# Altium PCB R100.230.080.001-00 MeasOutUI.PcbDoc
Units mm, origin at the board's own origin, x right, y up, seen from the top; angles counter-clockwise.
Board outline 45 x 70 mm, 2 copper layers (Top, Bottom), stack 1.571 mm thick; 95 components, 64 nets, 333 pads, 118 vias.
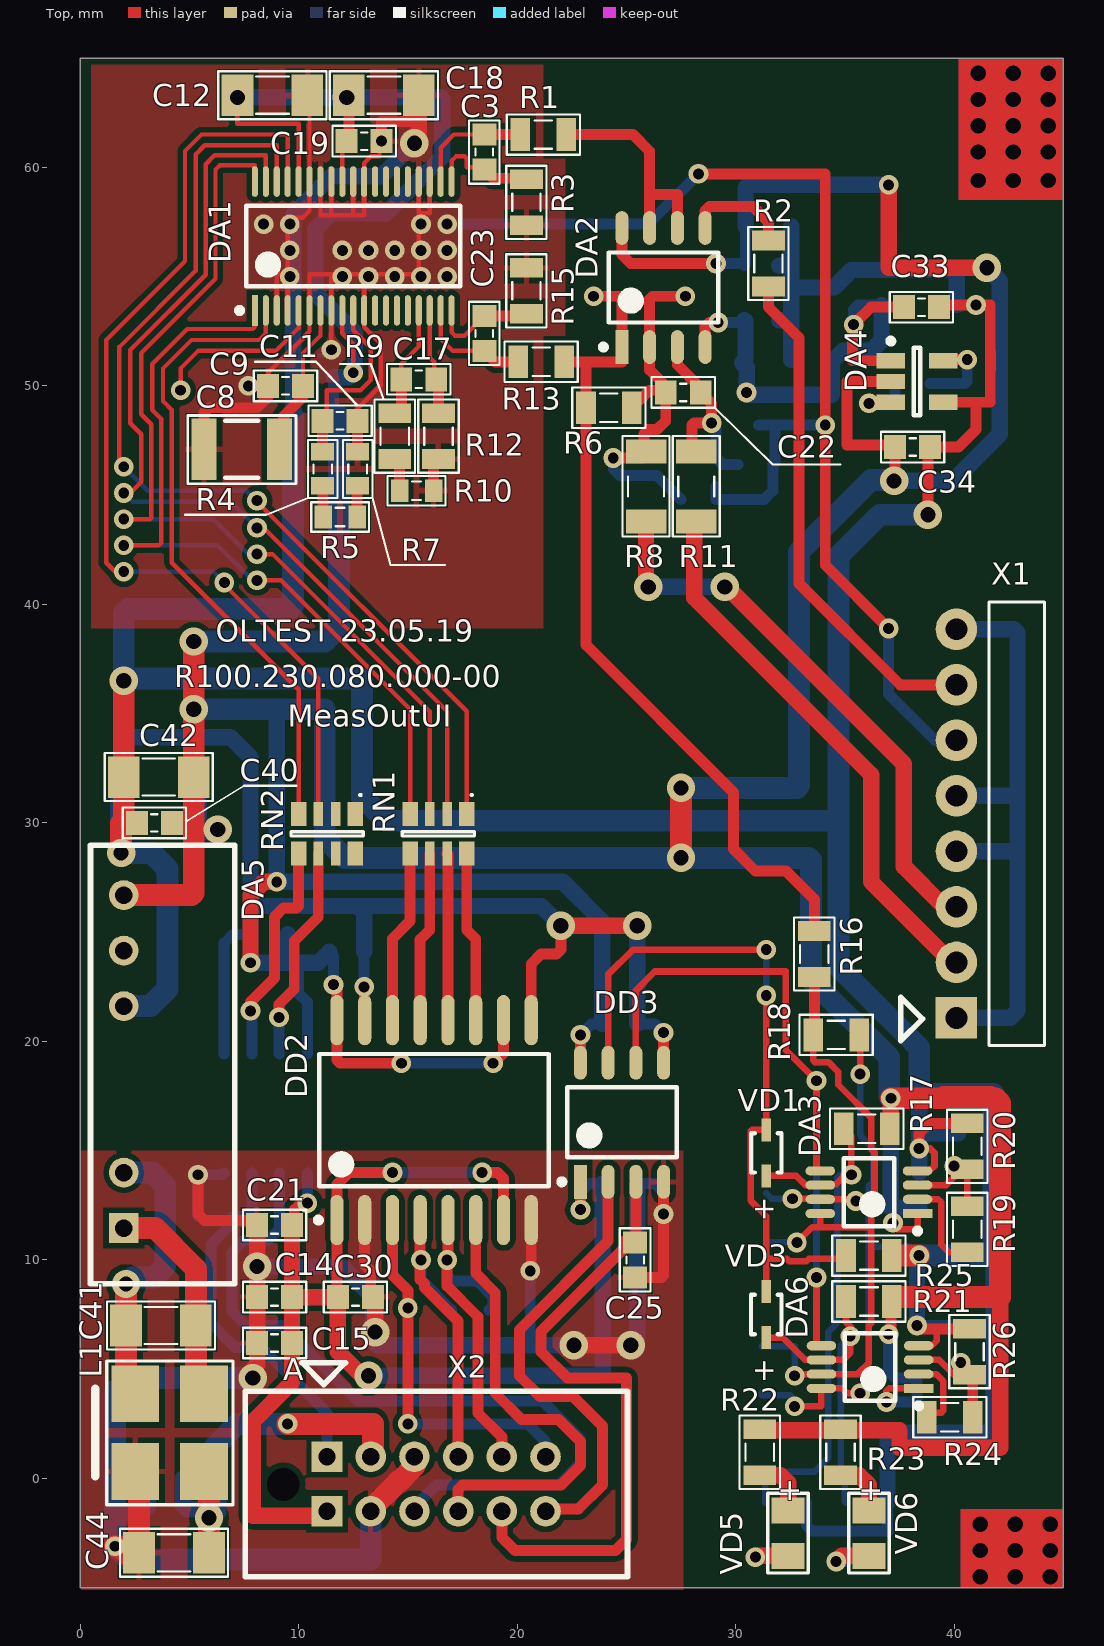
[diagram p0: Top view]
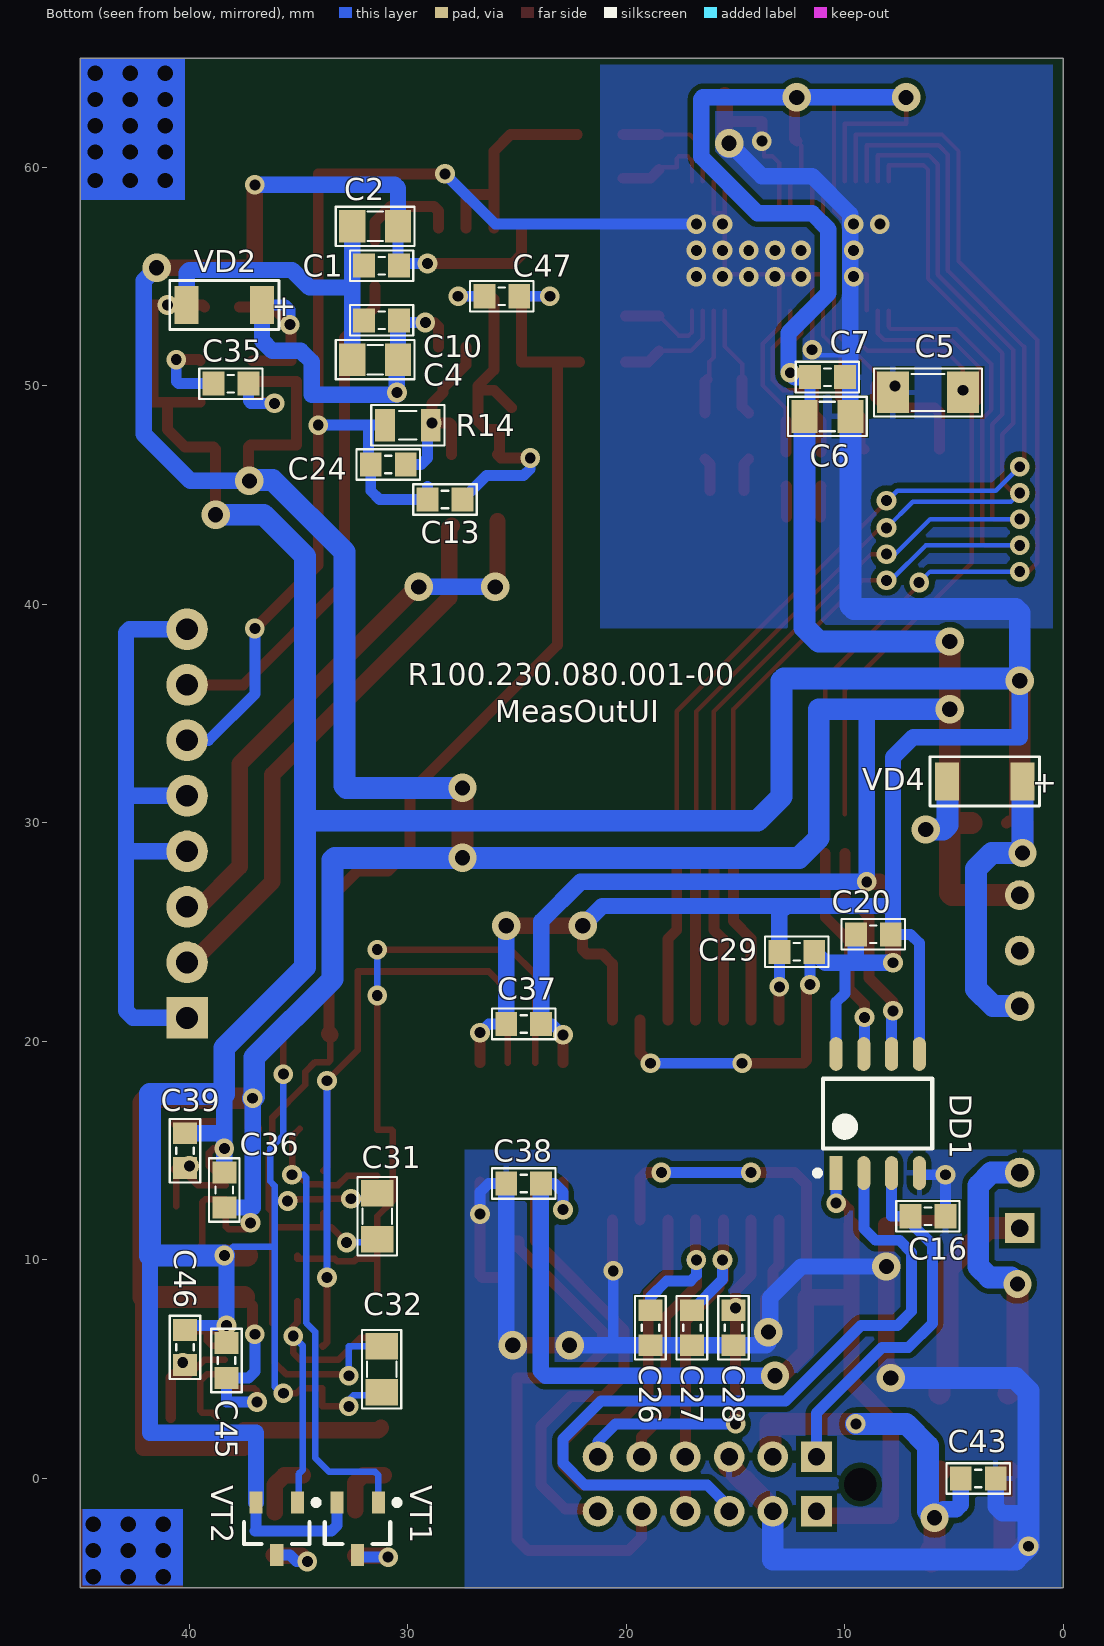
[diagram p1: Bottom view, seen from below]
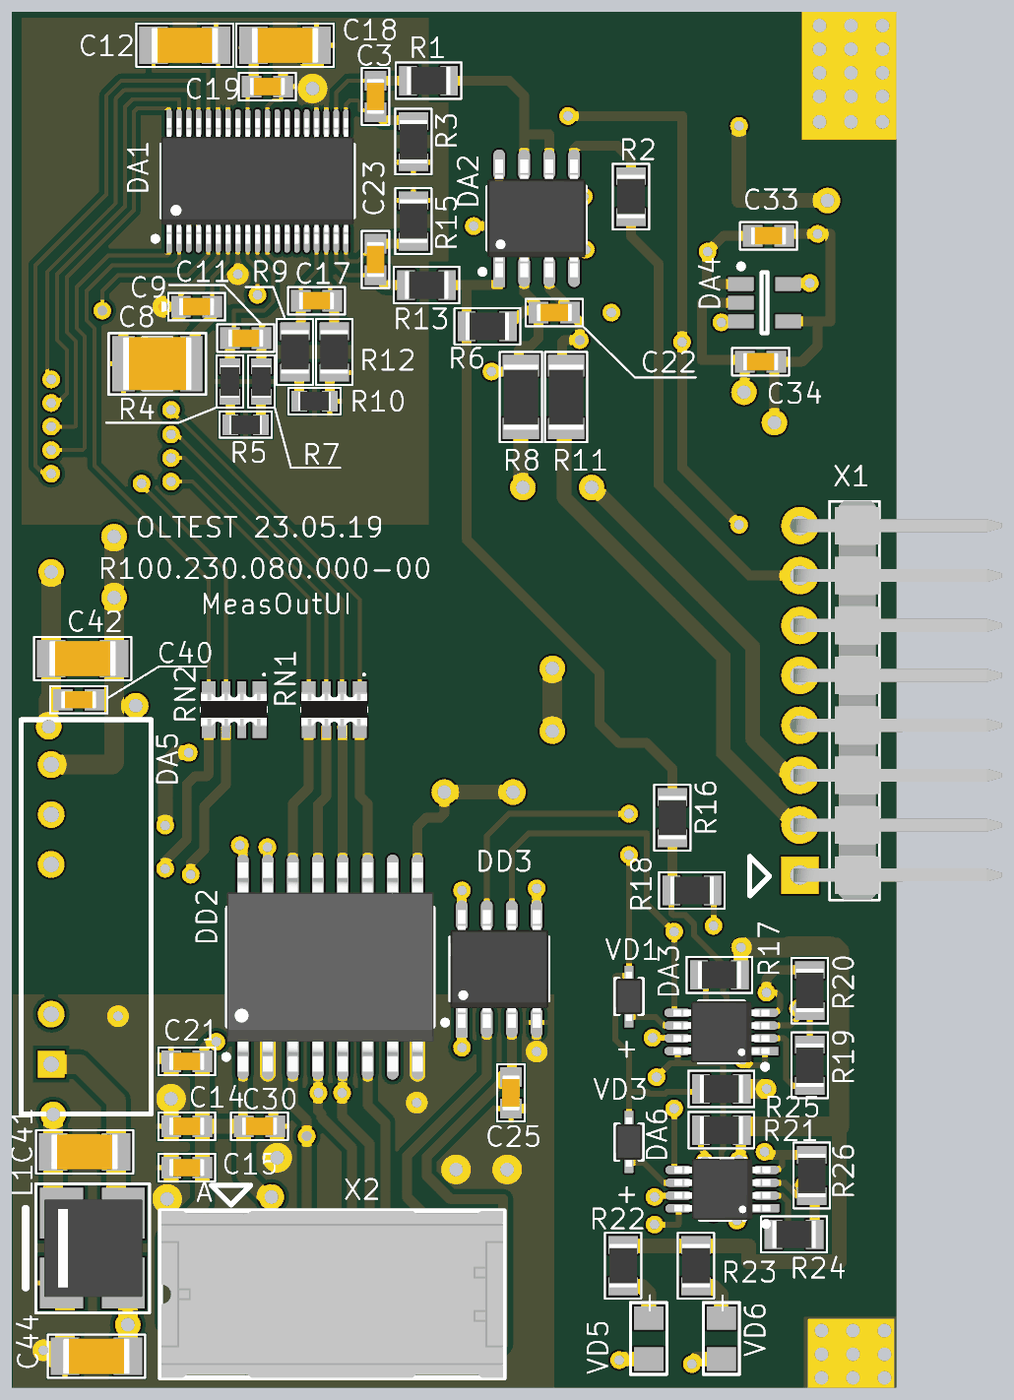
[diagram p2: 3D render of the assembled board from above, using the file's embedded part models]
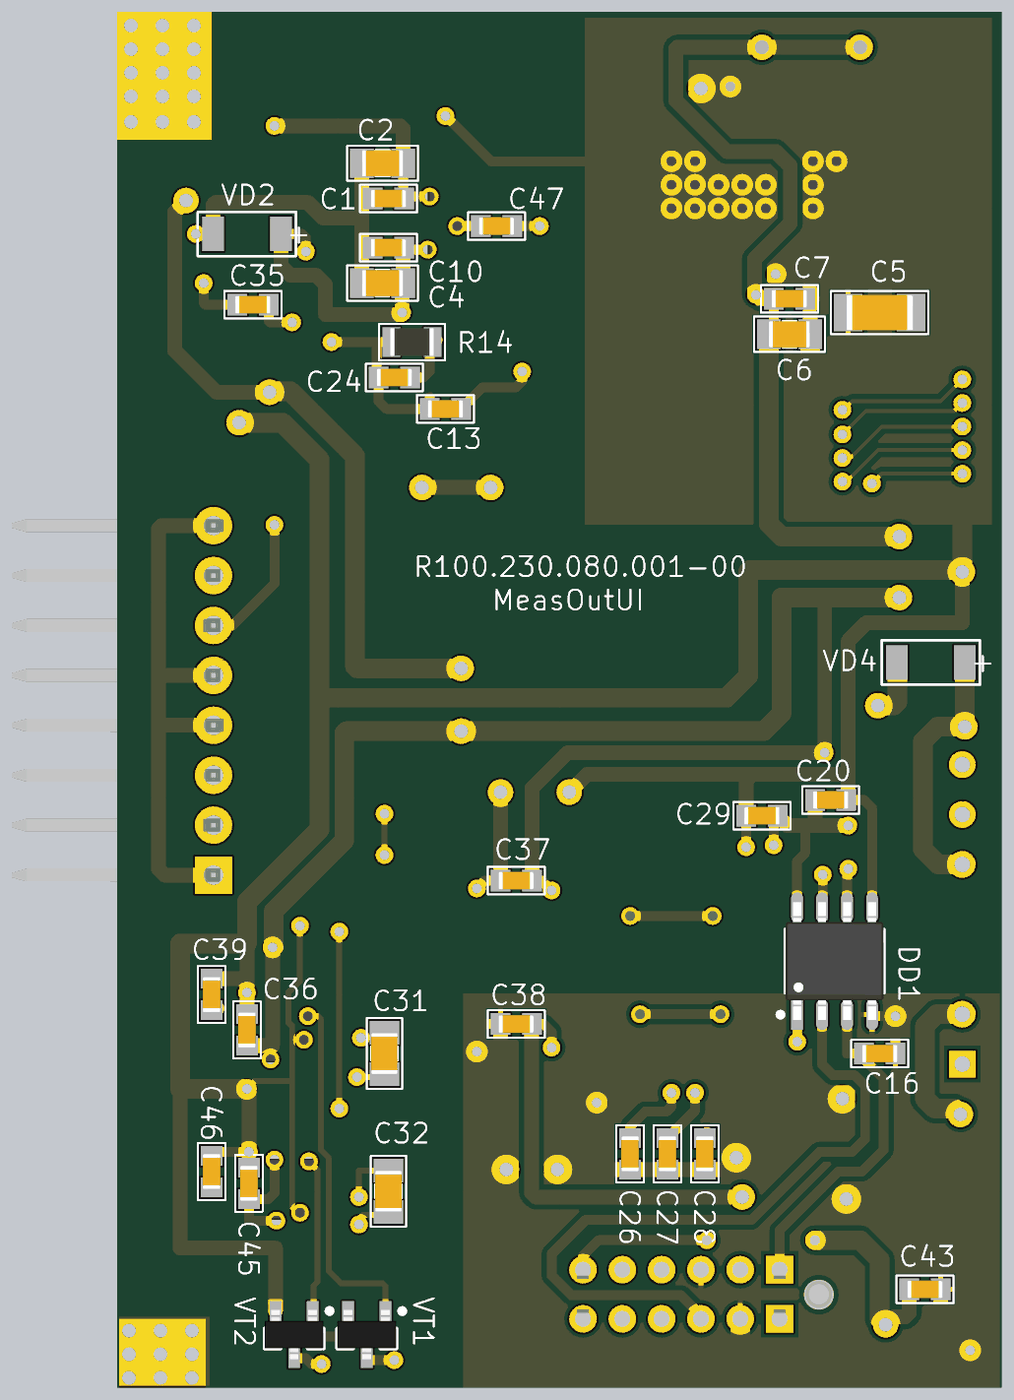
[diagram p3: 3D render of the assembled board from below, using the file's embedded part models]

## Layer stack, top to bottom
Top Solder: solder mask 0.0102, Solder Resist, Dk 3.5
Top: signal copper 0.0356
Dielectric 1: dielectric 1.5, FR-4, Dk 4.8
Bottom: signal copper 0.0356
Bottom Solder: solder mask 0.0102, Solder Resist, Dk 3.5

## Board outline
0,-5 0,65 45,65 45,-5

## Design rules (kind name [scope] priority, off if disabled: settings)
Clearance Clearance_1 [(ObjectKind = 'Pad') And (Component = 'DA6')] p1: gap=0.254 except(0.1: SMDPad-SMDPad)
Clearance DA3_pad [(ObjectKind = 'Pad') And (Component = 'DA3')] p2: gap=0.254 except(0.1: SMDPad-SMDPad)
Clearance DA4_pad [(ObjectKind = 'Pad') And (Layer = 'Top') And (Component = 'DA4')] p3: gap=0.254 except(0.1: SMDPad-SMDPad)
Clearance DA1_pad [(ObjectKind = 'Pad') And (Layer = 'Top') And (Component = 'DA1')] p4: gap=0.254 except(0.1: SMDPad-SMDPad)
Clearance [All] p5: gap=0.254 except(0.15: SMDPad-SMDPad)
ComponentClearance [All] p1: gap=0.2 collisioncheckmode=3 verticalgap=0.254 showdistances=FALSE
PolygonConnect "Comp direct connect" [(ObjectKind = 'Pad') And (Component = 'DD2')  or (ObjectKind = 'Via')] p1: connectstyle=Direct reliefconductorwidth=0.254 reliefentries=4 polygonreliefangle="90 Angle" airgapwidth=0.254
PolygonConnect [All] p2: connectstyle=Relief reliefconductorwidth=0.254 reliefentries=4 polygonreliefangle="90 Angle" airgapwidth=0.254
RoutingVias [All] p1: holewidth=1 width=1.8 viastyle="Through Hole" minholewidth=0.5 minwidth=0.9 maxholewidth=0.7 maxwidth=1.3
SolderMaskExpansion [All] p1: expansion=0.102
Width [All] p1: maxlimit=2 minlimit=0.1 preferedwidth=1
29 further rules are at their usual default settings.

## Components (designator, comment, footprint, x,y, rotation, side; value= is the part's Value field where it differs from the comment)
C1 "0.1u" SMD_C_0603 31.2,55.5 r180 bottom
C2 "4.7u" SMD_C_0805 31.5,57.3 r0 bottom
C3 "10nF" SMD_C_0603 18.5,60.7 r90 top
C4 "4.7u" SMD_C_0805 31.5,51.2 r180 bottom
C5 "10u" SMD_C_1206 6.2,49.7 r0 bottom
C6 "4.7u" SMD_C_0805 10.8,48.6 r180 bottom
C7 "1u" SMD_C_0603 10.8,50.4 r180 bottom
C8 "22u" SMD_C_1210 7.4,47.1 r180 top
C9 "1u" SMD_C_0603 9.4,50 r180 top
C10 "0.1u" SMD_C_0603 31.2,53 r0 bottom
C11 "1n" SMD_C_0603 11.9,48.4 r180 top
C12 "10u" SMD_C_1206 8.8,63.3 r180 top
C13 "100p" SMD_C_0603 28.3,44.8 r180 bottom
C14 "0.1u" SMD_C_0603 8.9,8.3 r0 top
C15 "1u" SMD_C_0603 8.9,6.2 r0 top
C16 "100p" SMD_C_0603 6.2,12 r0 bottom
C17 "10nF" SMD_C_0603 15.5,50.3 r180 top
C18 "10u" SMD_C_1206 13.9,63.3 r180 top
C19 "1u" SMD_C_0603 13,61.2 r180 top
C20 "0.1u" SMD_C_0603 8.7,24.9 r0 bottom
C21 "0.1u" SMD_C_0603 8.9,11.6 r0 top
C22 "1n" SMD_C_0603 27.6,49.7 r180 top
C23 "10nF" SMD_C_0603 18.5,52.4 r270 top
C24 "100p" SMD_C_0603 30.9,46.4 r0 bottom
C25 "100p" SMD_C_0603 25.4,10 r90 top
C26 "100p" SMD_C_0603 18.9,6.9 r90 bottom
C27 "100p" SMD_C_0603 17,6.9 r90 bottom
C28 "100p" SMD_C_0603 15.1,6.9 r90 bottom
C29 "0.1u" SMD_C_0603 12.2,24.1 r180 bottom
C30 "0.1u" SMD_C_0603 12.6,8.3 r180 top
C31 "10nF" SMD_C_0805 31.4,12 r270 bottom
C32 "10nF" SMD_C_0805 31.2,5 r90 bottom
C33 "1u" SMD_C_0603 38.5,53.6 r180 top
C34 "1u" SMD_C_0603 38.1,47.2 r180 top
C35 "1u" SMD_C_0603 38.1,50.1 r0 bottom
C36 "10nF" SMD_C_0603 38.4,13.2 r270 bottom
C37 "0.1u" SMD_C_0603 24.7,20.8 r180 bottom
C38 "0.1u" SMD_C_0603 24.7,13.5 r180 bottom
C39 "1n" SMD_C_0603 40.2,15 r270 bottom
C40 "0.1u" SMD_C_0603 3.4,30 r0 top
C41 "10u" SMD_C_1206 3.7,7 r0 top
C42 "10u" SMD_C_1206 3.6,32.1 r0 top
C43 "0.1u" SMD_C_0603 3.9,0 r0 bottom
C44 "10u" SMD_C_1206 4.3,-3.4 r0 top
C45 "10nF" SMD_C_0603 38.3,5.4 r270 bottom
C46 "1n" SMD_C_0603 40.2,6 r270 bottom
C47 "100p" SMD_C_0603 25.7,54.1 r180 bottom
DA1 "ADS8684AIDBT" TSSOP38 12.5,56.4 r90 top
DA2 "AD822AR" SOIC-8 26.7,54.5 r90 top
DA3 "INA200AIDGK" "TSOP-8 65P490X110" 36.1,13.1 r180 top
DA4 "TPS60400DBVR" TI-DBV5_M 38.3,50.2 r0 top
DA5 "TMV1205S" SIP7 2,11.46 r90 top
DA6 "INA200AIDGK" "TSOP-8 65P490X110" 36.15,5.1 r180 top
DD1 "ADUM3201ARZ" SOIC-8 8.5,16.7 r90 bottom
DD2 "ADUM3401B" ADI-RW-16_N 16.2,16.4 r90 top
DD3 "ADUM3201ARZ" SOIC-8 24.8,16.3 r90 top
L1 "DLW5BSM302SQ2" DLW5BS(AH) 4.1,2.1 r270 top
R1 "390" SMD_R_0805 21.2,61.5 r180 top
R2 "1K" SMD_R_0805 31.5,55.6 r90 top
R3 "390" SMD_R_0805 20.425,58.4 r90 top
R4 "1K" SMD_R_0603 11.1,46.2 r90 top
R5 "0R" SMD_R_0603 11.9,44 r180 top
R6 "200K" SMD_R_0805 24.2,49 r180 top
R7 "1K" SMD_R_0603 12.7,46.2 r90 top
R8 "6.81K" SMD_R_1206 25.9,45.4 r90 top
R9 "390" SMD_R_0805 14.4,47.7 r90 top
R10 "0R" SMD_R_0603 15.4,45.2 r180 top
R11 "6.81K" SMD_R_1206 28.2,45.4 r90 top
R12 "390" SMD_R_0805 16.4,47.7 r90 top
R13 "390" SMD_R_0805 21.1,51.1 r180 top
R14 "200K" SMD_R_0805 30,48.2 r180 bottom
R15 "390" SMD_R_0805 20.425,54.35 r270 top
R16 "1.2K" SMD_R_0805 33.6,24 r90 top
R17 "2.2K" SMD_R_0805 36,16 r0 top
R18 "49.9" SMD_R_0805 34.6,20.3 r180 top
R19 "680K" SMD_R_0805 40.6,11.4 r270 top
R20 "130K" SMD_R_0805 40.6,15.2 r270 top
R21 "2.2K" SMD_R_0805 36.1,8.1 r0 top
R22 "390" SMD_R_0805 31.1,1.2 r90 top
R23 "390" SMD_R_0805 34.8,1.2 r90 top
R24 "680K" SMD_R_0805 39.8,2.8 r0 top
R25 "200K" SMD_R_0805 36.1,10.2 r180 top
R26 "130K" SMD_R_0805 40.7,5.8 r270 top
RN1 "100" CRA06S 16.4,29.5 r270 top
RN2 "100" CRA06S 11.3,29.5 r270 top
VD1 "NSR0320MW2T1G" "SOD 2 FL250X100" 31.4,14.9 r270 top
VD2 "BZV55-B5V6" SOD80C 38.4,53.7 r0 bottom
VD3 "NSR0320MW2T1G" "SOD 2 FL250X100" 31.4,7.5 r270 top
VD4 "BZV55-B5V6" SOD80C 3.6,31.9 r0 bottom
VD5 "LL-S172SC-2S" SMD_LED_LL_RED 32.4,-2.5 r270 top
VD6 "LL-S172SC-2S" SMD_LED_LL_RED 36.1,-2.5 r270 top
VT1 "PDTC114ET" SOT23-3 32.3,-2.3 r270 bottom
VT2 "PDTC114ET" SOT23-3 36,-2.3 r270 bottom
X1 "PLS-8R" "PLS_R-1X8 (22-28-9080 MPLEX)" 40.1,27.43 r90 top
X2 "MI II (53313-1265)" 53313-1265 11.3,1 r0 top

## Footprints (in the part's own frame and the unit in brackets; to place one, negate y for a bottom-side part, rotate by r counter-clockwise, add the part's x,y. Pads: shape width x height; smd on the part's side, far side on the other; paste and mask are expansions set on the pad)
53313-1265 [mm] "MI II"
  round 0 hole 1.5: 0(-2,-1.27)
  rect 1.4x1.4 hole 0.8: 1A(0,0) 1B(0,-2.5)
  round 1.4 hole 0.8: 2A(2,0) 2B(2,-2.5) 3A(4,0) 3B(4,-2.5) 4A(6,0) 4B(6,-2.5) 5A(8,0) 5B(8,-2.5) 6A(10,0) 6B(10,-2.5)
  silkscreen extent -3.75,-5.5 13.75,4.3, body extent -3.7,-5.5 13.7,3, height 6.51
ADI-RW-16_N [mm] "SOIC, 16-Leads, Body 10.3x7.5mm, Pitch 1.27mm, IPC Medium Density"
  oval 2.3x0.6 smd: 1(-4.575,4.445) 2(-4.575,3.175) 3(-4.575,1.905) 4(-4.575,0.635) 5(-4.575,-0.635) 6(-4.575,-1.905) 7(-4.575,-3.175) 8(-4.575,-4.445) 9(4.575,-4.445) 10(4.575,-3.175) 11(4.575,-1.905) 12(4.575,-0.635) 13(4.575,0.635) 14(4.575,1.905) 15(4.575,3.175) 16(4.575,4.445)
  silkscreen extent -4.7,-5.25 3.03,5.42, body extent -5.31,-5.25 5.32,5.25, height 2.62
CRA06S [mm] "Chip Array, ConvexS, 8-Leads, Pitch 0,80mm,  Body 3,20x1,50mm,  IPC Low Density"
  rect 1.1x0.7 smd: 1(-0.9,1.295) 4(-0.9,-1.295) 5(0.9,-1.295) 8(0.9,1.295)
  rect 1.1x0.45 smd: 2(-0.9,0.4) 3(-0.9,-0.4) 6(0.9,-0.4) 7(0.9,0.4)
  silkscreen extent -1.83,-1.65 0.1,1.65, body extent -0.87,-1.68 0.87,1.68, height 0.6
DLW5BS(AH) [mil] "SMD Inductor"
  rect 102.24x86 smd: 1(-70,-62) 2(70,-62) 3(70,62) 4(-70,62)
  silkscreen extent -129,-134 130,114, body extent -98,-96 98,100, height 96
"PLS_R-1X8 (22-28-9080 MPLEX)" [mm]
  rect 1.9x1.9 hole 1: 1(-6.35,0)
  round 1.9 hole 1: 2(-3.81,0) 3(-1.27,0) 4(1.27,0) 5(3.81,0) 6(6.35,0) 7(8.89,0) 8(11.43,0)
  silkscreen extent -7.62,-4.04 12.67,2.55, body extent -7.62,-10.26 12.7,0.52, height 2.5
SIP7 [mm]
  rect 1.36x1.36 hole 0.8 mask+0.102: 1(0,0)
  round 1.36 hole 0.8 mask+0.102: 2(2.54,0) 5(10.16,0) 6(12.7,0) 7(15.24,0)
  silkscreen extent -2.54,-5.08 17.53,1.52, body extent -2.54,-5.08 17.53,1.52, height 10.16
SMD_C_0603 [mm]
  rect 1x1.1 smd: 1(-0.8,0) 2(0.8,0)
  silkscreen extent -1.45,-0.7 1.45,0.7, body extent -0.9,-0.45 0.9,0.45, height 0.7
SMD_C_0805 [mm]
  rect 1.2x1.5 smd: 1(-1.05,0) 2(1.05,0)
  silkscreen extent -1.8,-0.9 1.8,0.9, body extent -1.05,-0.67 1.05,0.67, height 0.7
SMD_C_1206 [mm]
  rect 1.45x1.9 smd: 1(-1.6,0) 2(1.6,0)
  silkscreen extent -2.47,-1.1 2.47,1.1, body extent -1.7,-0.9 1.7,0.9, height 1.6
SMD_C_1210 [mm] "Chip Capacitor, 2-Leads, Body 3,20x2,50mm, IPC Low Density"
  rect 1.15x2.8 smd: 1(-1.725,0) 2(1.725,0)
  silkscreen extent -2.47,-1.55 2.47,1.57, body extent -1.75,-1.35 1.75,1.35, height 2.5
SMD_LED_LL_RED [mil] "Chip Diode, 2-Leads, Body 2,00x1,25mm, IPC Low Density"
  rect 47x59 smd: 1(-41,0) 2(41,0)
  silkscreen extent -72,-36 72,36, body extent -41,-27 41,27, height 31
SMD_R_0603 [mm]
  rect 0.8x1.05 smd: 1(-0.775,0) 2(0.775,0)
  silkscreen extent -1.33,-0.67 1.33,0.67, body extent -0.82,-0.48 0.82,0.48, height 0.5
SMD_R_0805 [mm]
  rect 0.9x1.5 smd: 1(-1.05,0) 2(1.05,0)
  silkscreen extent -1.68,-0.92 1.68,0.92, body extent -1.1,-0.7 1.1,0.7, height 0.5
SMD_R_1206 [mm]
  rect 1.1x1.85 smd: 1(-1.6,0) 2(1.6,0)
  silkscreen extent -2.3,-1.07 2.3,1.07, body extent -1.65,-0.87 1.65,0.87, height 0.6
SOD80C [mm] "MELF Diode, 2-Leads, Body 3,50x1,53mm, IPC Medium Density"
  rect 1.1x1.75 smd: 1(-1.725,0) 2(1.725,0)
  silkscreen extent -2.5,-1.12 2.5,1.12, body extent -1.85,-0.8 1.85,0.8, height 1.6
"SOD 2 FL250X100" [mm] "SODFL, 2-Leads, Body 1,25x2,50mm, IPC Medium Density"
  rect 1.05x0.45 smd: 1(-1.05,0) 2(1.05,0)
  silkscreen extent -0.9,-0.7 0.9,0.7, body extent -1.25,-0.67 1.25,0.67, height 1
SOIC-8 [mm]
  rect 1.55x0.6 smd: 1(-2.725,1.905)
  oval 1.55x0.6 smd: 2(-2.725,0.635) 3(-2.725,-0.635) 4(-2.725,-1.905) 5(2.725,-1.905) 6(2.725,-0.635) 7(2.725,0.635) 8(2.725,1.905)
  silkscreen extent -2.85,-2.5 1.6,2.88, body extent -3,-2.5 3,2.5, height 1.75
SOT23-3 [mm] "SOT23, 3-Leads, Body 2,90x2,45mm, Pitch 0,95mm, IPC Medium Density"
  rect 1x0.6 smd: 1(-1.2,0.95) 2(-1.2,-0.95) 3(1.2,0)
  silkscreen extent -1.32,-1.5 0.7,1.92, body extent -1.25,-1.5 1.25,1.5, height 1.05
TI-DBV5_M [mm] "SOT23, 5-Leads, Body 2.9x1.6mm, Pitch 0.95mm, IPC Low Density"
  rect 1.3x0.7 smd: 1(-1.2,0.95) 2(-1.2,0) 3(-1.2,-0.95) 4(1.2,-0.95) 5(1.2,0.95)
  silkscreen extent -1.32,-1.55 0.15,1.97, body extent -0.87,-1.52 0.87,1.53, height 1.45
"TSOP-8 65P490X110" [mm] "TSOP, 8-Leads, Body 3,00x3,00mm, Pitch 0,65mm, IPC Medium Density"
  rect 1.35x0.419 smd: 1(-2.225,0.975)
  oval 1.35x0.419 smd: 2(-2.225,0.325) 3(-2.225,-0.325) 4(-2.225,-0.975) 5(2.225,-0.975) 6(2.225,-0.325) 7(2.225,0.325) 8(2.225,0.975)
  silkscreen extent -2.35,-1.55 1.15,1.9, body extent -2.45,-1.55 2.45,1.55, height 1.1
TSSOP38 [mm] "TSSOP, 38-Leads, Body 9,70x4,40mm, Pitch 0,50mm, IPC Medium Density"
  rect 1.4x0.279 smd: 1(-2.95,4.5)
  oval 1.4x0.279 smd: 2(-2.95,4) 3(-2.95,3.5) 4(-2.95,3) 5(-2.95,2.5) 6(-2.95,2) 7(-2.95,1.5) 8(-2.95,1) 9(-2.95,0.5) 10(-2.95,0) 11(-2.95,-0.5) 12(-2.95,-1) 13(-2.95,-1.5) 14(-2.95,-2) 15(-2.95,-2.5) 16(-2.95,-3) 17(-2.95,-3.5) 18(-2.95,-4) 19(-2.95,-4.5) 20(2.95,-4.5) 21(2.95,-4) 22(2.95,-3.5) 23(2.95,-3) 24(2.95,-2.5) 25(2.95,-2) 26(2.95,-1.5) 27(2.95,-1) 28(2.95,-0.5) 29(2.95,0) 30(2.95,0.5) 31(2.95,1) 32(2.95,1.5) 33(2.95,2) 34(2.95,2.5) 35(2.95,3) 36(2.95,3.5) 37(2.95,4) 38(2.95,4.5)
  silkscreen extent -3.07,-4.9 1.85,5.32, body extent -3.2,-4.9 3.2,4.9, height 1.2

## Part data
C1 C10 C14 C20 C21 C29 C30 C37 C38 C40 C43: library part "C0603 0.1u 50V 10%", "SMD C 0603 MURATA 50V 10% X7R"
C2 C4 C6: library part "C0805 4.7u 25V 20%  X5R", "SMD C 0805 MURATA 50V 5% NP0"
C3 C17 C23 C36 C45: library part "C0603 10nF 100V 10%", "SMD C 0603 MURATA 100V 10% X7R"
C5 C12 C18 C41 C42 C44: library part "C1206 10u 25V 20%", "SMD C 1206 MURATA 25V 20% X5R"
C7 C9 C15 C19 C33 C34 C35: library part "C0603 1uF 25V 10%", "SMD C 0603 MURATA 25V 10% X7R"
C8: library part "C1210 22u 25V 10%", "SMD C 1210 MURATA 22uF 25V 10%  X7R"
C11 C22 C39 C46: library part "C0603 1n 50V 5%", "SMD C 0603 MURATA 50V 5% NP0"
C13 C16 C24 C25 C26 C27 C28 C47: library part "C0603 100p 100V 5%", "SMD C 0603 MURATA 100V 5% NP0"
C31 C32: library part "C0805 10n 100V 20%", "SMD C 0805 MURATA 100V 20% X7R"
DA1: "16-bit 500ksps ADC with MUX"
DA2: "2xOp Ampl Rail FET 30V"
DA3 DA6: "Current-Shunt Monitor Ref G=20"
DA4: "-1.8 to -5.25 V, Inverting Charge Pump, 60 mA, 1.8 to 5.25 V Input with 2-Cell Alkaline / Nixx Input, -40 to 85 degC, 5-pin SOT23 (DBV5), Green (RoHS & no Sb/Br)"
DA5: "DC/DC"
DD1 DD3: "Dual Channel Digital Isolator, Enhanced System-Level ESD Reliability, 2.5 KV rms Insulation Rating, 1 Mbps Data Rate, 150 ns Delay, Industrial, 8-pin SOIC (R-8), Tube"
DD2: library part ADUM3401BRWZ, "Quad Channel Digital Isolator, Enhanced System-Level ESD Reliability, 2.5 KV rms Insulation Rating, 10 Mbps Data Rate, 50 ns Delay, Industrial, 16-pin SOIC (RW-16), Tube"
L1: "SMD Common Mode Choke Coil 0.5A Z = 3000 Ohm / 100 MHz"
R1 R3 R9 R12 R13 R15 R22 R23: library part "R0805 390R +-1%", "SMD R 0805 VISHAY 0.125W 150V 1% 100ppm"
R2: library part "R0805 1K 1%", "SMD R 0805 VISHAY 0.125W 150V 1% 100ppm"
R4 R7: library part "R0603 1K 1%", "SMD R 0603 VISHAY 0.1W 75V 1% 100ppm"
R5 R10: library part "R0603 0R 1%", "SMD R 0603 VISHAY 0.1W 75V 1% 100ppm"
R6 R14 R25: library part "R0805 200K 1%", "SMD R 0805 VISHAY 0.125W 150V 1% 100ppm"
R8 R11: library part "R1206 6.81K 1%", "SMD R 1206 VISHAY 0.25W 150V 1% 100ppm"
R16: library part "R0805 1.2K 1%", "SMD R 0805 VISHAY 0.125W 150V 1% 100ppm"
R17 R21: library part "R0805 2.2K 1%", "SMD R 0805 VISHAY 0.125W 150V 1% 100ppm"
R18: library part "R0805 49.9 1%", "SMD R 0805 VISHAY 0.125W 150V 1% 100ppm"
R19 R24: library part "R0805 680K 1%", "SMD R 0805 VISHAY 0.125W 150V 1% 100ppm"
R20 R26: library part "R0805 130K 1%", "SMD R 0805 VISHAY 0.125W 150V 1% 100ppm"
RN1 RN2: library part "CRA06S 4x100 1%", "SMD RESISTOR ARRAY VISHAY 0.063W 50V 1% 100ppm"
VD1 VD3: "Vr=20V If=1A Schottky Diode"
VD2 VD4: "0.5W Vz=5.6V +-2%"
VD5 VD6: "LED Red SMD"
VT1 VT2: "Digital Transistor (BRT), R1=10 kOhm, R2=10 kOhm, NPN Transistor"
X1: library part "PLS-8R (22-28-9080)", "Molex KK254 42377 LS=2.54 4A 250VDC PCB"
X2: library part 53313-1265, "MI II 12 (6x2row), 2A 125V 2mm"

## Free pads (board coordinates)
  round 0 hole 0.7: 7(41.1,59.4) 7(41.1,60.7) 7(41.1,61.9) 7(41.1,63.1) 7(41.1,64.3) 7(41.2,-4.5) 7(41.2,-3.3) 7(41.2,-2.1) 7(42.7,59.4) 7(42.7,60.7) 7(42.7,61.9) 7(42.7,63.1) 7(42.7,64.3) 7(42.8,-4.5) 7(42.8,-3.3) 7(42.8,-2.1) 7(44.3,59.4) 7(44.3,60.7) 7(44.3,61.9) 7(44.3,63.1) 7(44.3,64.3) 7(44.4,-4.5) 7(44.4,-3.3) 7(44.4,-2.1)

## Via types
v1: diameter 0.9, hole 0.5, Top to Bottom, 93 vias
v2: diameter 1.3, hole 0.7, Top to Bottom, 25 vias

## Nets (pads, with @x,y where several pads share a name; then routed paths per layer and width w, separated by ;. In a path a pad name is that pad's centre, name@x,y a point inside that pad or via, vN(x,y) a via of type N, cw(c..) or ccw(c..) an arc to the next point about the centre after c; other vN are vias at no path point)
+V5_M: C1.2 C2.1 C6.1 C7.1 C12.2 C18.2 C19.2 C20.2 C29.2 C34.2 C36.2 C37.2 C40.2 C42.2 C45.2 DA1.9 DA1.30 DA1.34 DA2.8 DA3.1 DA4.2 DA5.7 DA6.1 DD1.8 DD2.10 DD2.16 DD3.8 R17.2 R21.2 R22.2 R23.2 VD4.2 | length 313.9
  Top w0.2: C12.2@7.2,62.7 7.2,62 9.524,62 9.528,61.996 10,61.996 DA1.34 ; DA1.9 12,52.402 12.5,51.902 v1(12.5,50.6) ; DA1.30 12,61 C19.2
  Top w0.3: v1(36.9,3.5) 36.9,4 37.025,4.125 DA6.1 ; v1@37.4,11.4 38.2,11.4 38.325,11.525 DA3.1
  Top w0.5: v1(11.6,22.6) 11.755,22.445 DD2.16 11.755,19.145 11.9,19 v1(14.7,19) ; C19.2 12.3,61.3 C18.2@12.3,63.2 ; v1(18.9,19) 19.375,19.475 DD2.10 ; DD3.8 22.895,20.295 v1(22.9,20.3) ; DA2.8 24.795,56.005 25.2,55.6 v1(29.1,55.6) ; v1(37,6.6) 37,6.7 37.1,6.8 37.1,7.9 R21.2@37.5,8.3 ; DA4.2 35.1,50.2 35.1,47.3 37.2,47.3 C34.2 37.3,45.7 v2(37.25,45.65)
  Top w0.75: v1(7.8,23.6) 7.8,26.7 8.4,27.3 v1(9,27.3) ; R22.2@31.229,2.321 31.35,2.2 37.5,2.2 37.5,1.4 42.104,1.4 42.104,8.3 ; v1(37,59.2) 37,55.4 v2(41.5,55.4) ; R17.2 37.1,16.05 v1(37.1,17.4)
  Top w1: DA5.7 5.1,26.7 5.2,26.8 5.2,30 ; C40.2 5.2,30 ; v2(5.2,38.3) v2(5.2,35.2) C42.2 5.2,30 ; v2(27.5,28.4) v2(27.5,31.6) ; v1(37.1,17.4) 39.484,17.4 39.538,17.454 41.662,17.454 41.716,17.4 41.9,17.4 42.104,17.196 42.104,8.3 R21.2@37.5,8.3
  Bottom w0.3: 37.1,12.4 37.2,12.3 v1(37.2,11.7)
  Bottom w0.5: 10,23.4 10,22.2 10.405,21.795 DD1.8 ; C29.2 11.6,23.9 v1(11.6,22.6) ; C7.1 11.6,48.85 C6.1 ; v1(14.7,19) v1(18.9,19) ; v1(22.9,20.3) 23.4,20.8 C37.2 ; v1(29.1,55.6) 30.3,55.6 C1.2 30.45,55.55 C2.1 ; v1(36.9,3.5) 38.3,3.5 C45.2 37.3,4.6 37,4.9 v1(37,6.6)
  Bottom w0.75: v2(7.2,63.2) v2(12.2,63.2) 16.5,63.2 16.579,63.121 16.579,60.479 14,57.9 11.5,57.9 10.754,57.154 10.754,54.246 12.579,52.421 12.579,50.679 v1(12.5,50.6) 12.3,50.4 C7.1 ; v1(7.8,23.6) 9.5,23.6 ; 9,35.2 v1(9,27.3) 22.1,27.3 23.9,25.5 C37.2 ; C20.2 9.5,23.6 ; C29.2 10.9,23.6 9.5,23.6 ; C2.1 30.45,59.05 30.6,59.2 v1(37,59.2) ; v1(37.1,17.4) 37.1,12.4 C36.2 ; v2(37.25,45.65) 39.95,45.65 42.079,47.779 42.079,54.821 v2(41.5,55.4) v2@41.4,55.4
  Bottom w1: v2(5.2,35.2) 9,35.2 11.2,35.2 11.2,29.3 12.1,28.4 v2(27.5,28.4) 33.346,28.4 33.446,28.3 33.446,22.854 37.028,19.272 37.028,17.472 v1(37.1,17.4) ; v2(5.2,38.3) 11.2,38.3 11.85,38.95 C6.1 ; VD4.2 5.3,31.875 5.3,29.9 5.5,29.7 v2(6.3,29.7) ; v2(27.5,31.6) 32.8,31.6 32.9,31.7 32.9,42.4 36.2,45.7 37.2,45.7 v2(37.25,45.65)
-V5_M: C4.2 C10.1 C33.2 DA2.4 DA4.1 VD2.1 | length 24.1
  Top w0.5: DA2.4 28.605,52.705 28.8,52.9 v1(29.2,52.9) ; DA4.1 35.35,51.15 35.35,52.75 v1(35.4,52.8) 36.2,53.6 C33.2
  Bottom w0.5: v1(29.2,52.9) 30.3,52.9 C10.1 ; v1(35.4,52.8) 35.4,53.5 35.6,53.7 VD2.1
  Bottom w0.75: C10.1 30.45,52.95 C4.2 30.3,51.05 30.5,50.85 v1(30.5,49.7) ; v1@30.5,49.6 34.4,49.6 34.4,51.1 34.9,51.6 36.2,51.6 36.675,52.075 VD2.1
ADC1_ALRM: DD1.2 X2.3B | length 36
  Bottom w0.5: DD1.2 9.135,11.435 8.6,10.9 7.5,10.9 6.946,10.346 6.946,7.654 7.6,7 9.268,7 12.722,3.546 21.154,3.546 22.9,1.8 22.9,0.7 21.904,-0.296 16.801,-0.296 16.797,-0.3 16.3,-0.3 15.3,-1.3 X2.3B
ADC1_CS: C27.2 DD2.4 X2.4A | length 14.4
  Top w0.5: DD2.4 15.565,9.101 15.754,8.912 15.754,8.746 17.3,7.2 X2.4A
  Bottom w0.5: v1(15.6,10) 15.6,9.1 C27.2
ADC1_MISO: DD2.6 X2.4B | length 21.3
  Top w0.5: X2.4B 17.3,-0.5 17.4,-0.4 17.504,-0.296 21.6,-0.296 22.004,-0.296 22.9,0.6 22.9,1.7 21.9,2.7 20.2,2.7 19,3.9 19,8 19,8.5 18.105,9.395 DD2.6
ADC1_MOSI: C28.2 DD2.3 X2.6A | length 16.9
  Top w0.5: DD2.3 14.295,9.305 15,8.6 v1(15,7.8) v1(15,2.5)
  Bottom w0.5: v1(15,2.5) 20.5,2.5 21.3,1.7 X2.6A
ADC1_RST: C16.2 DD1.3 X2.1A | length 17.4
  Bottom w0.5: DD1.3 7.865,12 C16.2 7,11.7 6,10.7 6,7.1 7.1,6 8.3,6 11.3,3 X2.1A X2.1A@11.1,1.2
ADC1_SCLK: C26.2 DD2.5 X2.5A | length 16.1
  Top w0.5: DD2.5 16.835,10.035 v1(16.8,10) 16.8,8.8 18.2,7.4 18.2,3 19.3,1.9 X2.5A
  Bottom w0.5: v1@17,10 v1(16.8,10) 16.8,9.3 17.054,9.046 18.154,9.046 18.9,8.3 C26.2 C26.2@18.7,7.7
ADC_ALRM: DD1.7 RN2.6 | length 9.9
  Top w0.5: v1(9.1,21.1) 9.1,21.7 9.8,22.4 9.8,24.6 10.9,25.7 RN2.6
  Bottom w0.5: v1(9.1,21.1) 9.1,19.46 DD1.7
ADC_RST: DD1.6 RN2.5 | length 10.5
  Top w0.5: v1(7.8,21.4) 7.8,21.8 8.9,22.9 8.9,25.7 9.3,26.1 9.9,26.1 10.005,26.205 RN2.5
  Bottom w0.5: v1(7.8,21.4) 7.865,21.335 DD1.6
CS: DD2.13 RN1.6 | length 7.8
  Top w0.5: DD2.13 15.565,24.665 16,25.1 RN1.6
GND: X1.1 X1.4 X1.5 X1.8 | length 28.7
  Bottom w0.75: X1.1 42.58,21.08 42.9,21.4 42.9,28.7 ; X1.4 42.9,28.7 ; X1.5 42.84,31.24 42.9,31.3 ; X1.8 42.74,38.86 42.9,38.7 42.9,31.3 ; 42.9,28.7 42.9,31.3
GND_C: C14.1 C15.1 C16.1 C21.1 C25.1 C26.1 C27.1 C28.1 C30.1 C38.1 C43.1 C44.1 DD1.4 DD2.2 DD2.8 DD3.4 L1.2 X2.2B X2.3A | length 101
  Top w0.5: v1(5.4,13.9) 5.4,12.1 5.7,11.8 7.9,11.8 C21.1 ; DD2.2 13.025,9.775 13.3,9.5 13.3,8.4 C30.1 ; v1(20.6,9.5) 20.6,9.3 20.645,9.345 DD2.8 ; C25.1@25.5,9.2 26.6,9.2 26.7,9.3 v1(26.7,12.1) 26.7,13.57 DD3.4
  Top w0.75: v2(7.9,4.6) 7.9,5 8.1,5.2 C15.1 C14.1 v2(8.1,9.7) C21.1 ; C30.1 13.5,8.2 v2(13.5,6.7) ; v2(22.6,6.1) v2(25.2,6.1)
  Top w1: v1(1.6,-3.1) 1.8,-3.1 2.4,-3.7 C44.1 2.7,0.147 L1.2 ; X2.2B 13.3,-1.4 14.578,-0.122 14.622,-0.122 15.3,0.556 X2.3A
  Bottom w0.5: C16.1 v1(5.4,13.9) 6.53,13.9 6.6,13.97 DD1.4 ; 20.6,6.1 v1(20.6,9.5) ; C38.1 26.3,13.5 26.7,13.1 v1(26.7,12.1)
  Bottom w0.75: 1.6,-1.8 1.8,-1.6 2.8,-1.6 3.1,-1.3 C43.1 ; v2(8.1,9.7) 12,9.7 13.421,8.279 13.421,6.779 v2(13.5,6.7) 13.5,6.2 13.6,6.1 C28.1 C27.1 C26.1 20.6,6.1 v2(22.6,6.1) ; v2(25.2,6.1) 25.5,6.4 C38.1
  Bottom w1: v2(7.9,4.6) 2.2,4.6 1.6,4 1.6,-1.8 v1(1.6,-3.1) 2.2,-3.7 13.3,-3.7 X2.2B
GNDA: C1.1 C2.2 C4.1 C5.2 C6.2 C7.2 C8.2 C9.2 C10.2 C11.1 C12.1 C13.1 C18.1 C19.1 C20.1 C24.2 C29.1 C31.1 C32.1 C33.1 C34.1 C36.1 C37.1 C39.1 C40.1 C42.1 C45.1 C46.1 DA1.3 DA1.4 DA1.6 DA1.8 DA1.11 DA1.22 DA1.23 DA1.28 DA1.29 DA1.31 DA1.32 DA1.33 DA3.4 DA3.7 DA4.4 DA5.5 DA6.4 DA6.8 DD1.5 DD2.9 DD2.15 DD3.5 R3.1 R7.2 R10.1 R12.1 R14.1 R15.1 R18.1 R20.1 R25.1 R26.1 VD2.2 VD4.1 VT1.2 VT2.2 X1.6 | length 432.6
  Top w0.2: C9.2@8.6,49.9 C9.2 8.6,50.6 10.5,52.5 DA1.6 10.5,55.1 11.5,55.1 ; DA1.3 9,55.1 v1@9.5,55.1 ; DA1.4 v1@9.5,55.1 ; C12.1 10.5,63.2 DA1.33 10.5,58 10.2,57.7 9.5,57.7 v1@9.5,55.1 ; DA1.32 11,57.8 11.5,57.8 ; v1(11.5,51.654) DA1.8 11.5,55.1 ; DA1.31 11.5,57.8 ; DA1.29 12.5,57.8 ; C11.1 12.7,48.958 13.758,50.016 13.758,51.928 13,52.686 DA1.11 v1@13,55.1 ; v1(13.8,61.2) 13.7,61.1 13.7,60.5 13.3,60.5 13,60.2 DA1.28 13,57.8 12.5,57.8 ; DA1.23 15.5,57.9 ; DA1.22 16,57.9 15.5,57.9 ; 11.5,55.1 v1@13,55.1 ; 11.5,57.8 12.5,57.8 ; v1@13,55.1 15.4,55.1 15.5,55.2 15.5,57.9
  Top w0.3: v1(32.6,12.8) 33.85,12.8 DA3.7 35.475,12.775 35.5,12.75 v1(35.5,12.7) ; v1(32.7,3.3) 33.925,3.3 DA6.8 34.875,4.125 35.1,3.9 v1(35.7,3.9) ; v1(35.7,18.5) R18.1@35.7,20.25 ; DA3.4 38.35,14.1 38.9,14.1 39.1,14.3 39.1,14.9 38.9,15.1 v1(38.4,15.1) ; DA6.4 38.975,6.075 39.2,6.3 39.2,6.8 39.15,6.85 ; R18.1@35.7,20.25 35.7,20.55 35.65,20.6 R18.1 R18.1@35.7,20.25
  Top w0.5: 2,30.1 2.5,30.1 C40.1 ; C8.2 5.675,48.775 5.9,49 8.1,49 8.6,49.5 C9.2@8.6,49.9 ; v1(7.7,50) C9.2 ; R7.2 C11.1 ; v1(13,22.5) 13.025,22.475 DD2.15 ; v1(13.8,61.2) 13.8,62.1 15.4,62.1 ; R10.1 16.175,46.425 R12.1 ; DD2.9 20.645,23.545 21.1,24 21.8,24 22,24.2 v2(22,25.3) ; v1(26.7,20.4) 26.705,20.395 DD3.5 ; v1(28.3,59.7) 34.1,59.7 v1(34.1,48.2) 34.1,41.8 v1(37,38.9) ; v1(38.3,7) 38.45,6.85 39.15,6.85 R26.1@40.5,6.85 ; v1(38.4,15.1) 38.4,15.8 38.85,16.25 R20.1 ; v2(38.8,44.1) 38.8,47.1 C34.1 40.2,47.2 41,48 41,49.1 40.85,49.25 ; C33.1 39.4,53.7 v1(41,53.7) 41.65,53.7 41.65,51.549 41.654,51.545 41.654,50.755 41.65,50.751 41.65,49.25 40.85,49.25 ; DA4.4 40.85,49.25
  Top w0.75: v2(15.3,61.1) 15.5,61.3 C18.1 ; v2(22,25.3) v2(25.5,25.3)
  Top w1: v2(1.875,28.625) 1.875,29.975 2,30.1 C42.1 v2(2,36.502) ; R25.1@37.35,10.2 v1(38.4,10.2)
  Bottom w0.2: 9.85,51.35 9.9,51.4 11.246,51.4 v1(11.5,51.654)
  Bottom w0.3: C32.1 31.2,3.8 32.5,3.8 32.7,3.6 v1(32.7,3.3) ; C31.1 31.65,12.8 v1(32.6,12.8) ; v1(35.5,12.7) 36.1,12.7 ; v1(35.7,3.9) 35.8,3.9 36.1,4.2 36.1,12.7 ; v1(35.7,18.5) 35.7,15.7 36.3,15.1 36.3,13.6 36.1,13.4 36.1,12.7 ; 36.2,10.6 38,10.6 v1(38.4,10.2)
  Bottom w0.5: DD1.5 6.595,24.495 7,24.9 7.8,24.9 C20.1 ; v1(13,22.5) C29.1 ; v1(16.8,57.4) 26,57.4 v1(28.3,59.7) ; C37.1 26.3,20.8 v1(26.7,20.4) ; 29.1,45.4 C13.1 31.3,44.8 31.7,45.2 C24.2 31.8,46.5 31.8,48.2 ; R14.1 31.8,48.2 ; C4.1 C4.1@32.6,51.15 ; VT1.2 33.25,-2.15 33.5,-2.4 37,-2.4 36.95,-2.35 VT2.2 ; v1(34.1,48.2) 31.8,48.2 ; v1(37,38.9) 37,35.9 39.12,33.78 X1.6 ; v1(38.3,7) C46.1@40.1,7 ; VD2.2 40.225,53.6 40.325,53.7 v1(41,53.7)
  Bottom w0.75: v2(2,36.502) 2.089,36.502 2,36.413 2,33.921 6.879,33.921 7.8,33 C20.1@7.8,24.9 ; 8.179,26.2 12.7,26.2 ; C6.2 9.75,57.85 11.5,59.6 13.8,59.6 15,60.8 15.4,60.8 15.1,61.1 v2(15.3,61.1) ; C29.1 13,25.9 12.7,26.2 ; v2(22,25.3) 21.1,26.2 12.7,26.2 ; C37.1 v2(25.5,25.3) ; C10.2 32.55,53 ; C1.1 32.55,55.5 ; C4.1 32.55,53 ; C2.2 32.55,55.5 ; VT2.2 36.95,2.1 41.8,2.1 41.8,10.2 ; v1(38.3,7) 38.3,10.1 v1(38.4,10.2) ; C36.1 v1(38.4,15.1) 38.4,15.8 ; 38.4,17.6 38.4,15.8 ; VD2.2 40.125,55.175 40,55.3 35.3,55.3 34.5,54.5 32.55,54.5 ; C39.1 38.4,15.8 ; 32.55,53 32.55,54.5 ; 32.55,54.5 32.55,55.5
  Bottom w1: VD4.1 v2(1.875,28.625) 3.275,28.625 4,27.9 4,22.4 3.22,21.62 DA5.5 ; v2(2,36.502) v2@2,36.604 ; C6.2 9.75,39.95 9.596,39.796 2.196,39.796 2,39.6 v2@2,36.604 ; v1(38.4,10.2) 41.8,10.2 41.8,17.6 38.4,17.6 38.4,19.714 34.7,23.414 34.7,27.914 34.704,27.918 34.704,30.096 34.7,30.1 ; v2(38.8,44.1) 36.6,44.1 34.7,42.2 34.7,30.1 ; v2@2,36.604 12.8,36.604 12.9,36.504 12.9,31.2 14,30.1 34.7,30.1
  other v1: 9.6,55 12,55 13.2,55 14.4,55 15.6,55 16.8,55 9.6,56.2 12,56.2 13.2,56.2 14.4,56.2 15.6,56.2 16.8,56.2 8.4,57.4 9.6,57.4 15.6,57.4
I_U+: R11.1 X1.2 | length 25.1
  Top w0.75: R11.1@28,43.6 28.1,43.5 28.1,40.3 36.2,32.2 36.2,27.3 39.88,23.62 X1.2
I_U-: R8.1 X1.3 | length 26
  Top w0.75: R8.1 25.9,40.9 v2(26,40.8) ; v2(29.5,40.8) 29.6,40.8 37.7,32.7 37.7,28 39.54,26.16 X1.3
  Bottom w0.75: v2(26,40.8) v2(29.5,40.8)
MISO: DD2.11 RN1.8 | length 7.8
  Top w0.5: RN1.8 17.695,25.105 18.105,24.695 DD2.11
MOSI: DD2.14 RN1.5 | length 8
  Top w0.5: DD2.14 14.295,24.7 15.1,25.505 15.1,28.595 RN1.5
NetC3_1: C3.1 DA1.20 R3.2 | length 4.8
  Top w0.2: DA1.20 17,60.3 17.2,60.5 17.6,60.5 17.7,60.4 17.7,60 18.4,60 C3.1
  Top w0.5: C3.1 18.9,59.5 R3.2@20.15,59.5
NetC3_2: C3.2 DA1.21 R1.2 | length 5.4
  Top w0.2: DA1.21 16.5,60.9 17.1,61.5 C3.2
  Top w0.5: C3.2 R1.2
NetC5_1: C5.1 DA1.5 | length 8.2
  Top w0.2: v1(4.6,49.8) 4.6,50.8 5.4,51.6 8.958,51.6 10,52.642 DA1.5
  Bottom w0.2: C5.1 4.7,49.8 v1(4.6,49.8)
NetC8_1: C8.1 C9.1 DA1.7 | length 7.1
  Top w0.2: C9.1 10.2,51.5 11,52.3 DA1.7
  Top w0.5: C8.1 9.3,47.275 9.3,48.6 10.2,49.5 C9.1
NetC11_2: C11.2 DA1.10 R4.2 | length 8.7
  Top w0.2: C11.2 11,48.5 11.296,48.796 11.296,49.796 12.833,49.796 13.304,50.267 13.304,51.74 12.5,52.544 DA1.10
  Top w0.5: R4.2 C11.2
NetC13_2: C13.2 C22.2 C47.1 DA2.2 R6.1 R8.2 | length 18.7
  Top w0.5: v1(24.4,46.7) 25.75,46.7 25.9,46.85 25.8,46.95 25.8,47.8 26,48 26.4,48 26.8,48.4 C22.2 ; R6.1 26.05,49.8 26.7,49.8 C22.2 ; v1(27.7,54.1) 26.2,54.1 26.065,53.965 DA2.2 26.065,50.735 26.8,50 C22.2
  Bottom w0.5: v1(24.4,46.7) 24.4,46.2 24.7,45.9 26.4,45.9 C13.2 ; C47.1 v1(27.7,54.1)
NetC17_1: C17.1 DA1.17 R12.2 | length 4.9
  Top w0.2: DA1.17 16,51.3 16.2,51.1 16.2,50.4 C17.1
  Top w0.5: C17.1 16.4,50.2 R12.2
NetC17_2: C17.2 DA1.16 R9.2 | length 5.2
  Top w0.2: C17.2 14.7,51 15.5,51.8 DA1.16
  Top w0.5: R9.2 14.7,49.05 C17.2
NetC22_1: C22.1 C24.1 DA2.3 R11.2 R14.2 | length 9.2
  Top w0.5: DA2.3 27.335,50.965 28.4,49.9 C22.1 28.9,49.2 v1(28.9,48.3) 28.1,48.3 28,48.2 R11.2@28,46.85
  Bottom w0.5: v1(28.9,48.3) 29.1,48.1 29.1,46.7 29.4,46.4 C24.1
NetC23_1: C23.1 DA1.19 R15.2 | length 4.5
  Top w0.2: DA1.19 17,52.454 17.154,52.3 17.6,52.3 C23.1
  Top w0.5: C23.1 R15.2@20.05,53.2
NetC23_2: C23.2 DA1.18 R13.2 | length 5.3
  Top w0.2: DA1.18 16.5,52.154 17.054,51.6 C23.2
  Top w0.5: C23.2 19,51.1 R13.2
NetC31_2: C31.2 C32.2 DA3.8 DA6.7 R16.1 R18.2 | length 32.2
  Top w0.3: v1(32.7,4.7) v1@32.7,4.775 ; v1(32.8,10.8) 33.5,11.5 36.196,11.5 ; R18.2 33.55,19.133 33.629,19.054 34.246,19.054 34.7,18.6 34.7,18.021 36.196,16.525 36.196,15.083 36.354,14.925 36.354,12.346 36.196,12.188 36.196,11.5 ; 33.875,11.525 DA3.8 ; v1@32.7,4.775 32.7,4.8 32.6,4.9 32.475,4.775 v1@32.7,4.775 ; v1@32.7,4.775 DA6.7 35.575,4.775 36.1,5.3 36.1,7.008 36.2,7.108 36.2,11.5 36.196,11.5
  Top w0.5: R18.2@33.6,20.35 R16.1
  Top w0.75: R18.2 R18.2@33.6,20.35
  Bottom w0.3: C32.2 32.7,6.05 v1(32.7,4.7) ; C31.2 31.55,10.8 v1(32.8,10.8)
NetC35_1: C35.1 DA4.3 | length 3.4
  Top w0.5: v1(36.1,49.2) 36,49.2 35.95,49.25 DA4.3
  Bottom w0.5: v1(36.1,49.2) 37.2,49.2 37.3,49.3 C35.1
NetC35_2: C35.2 DA4.5 | length 3.9
  Top w0.5: DA4.5 39.55,51.2 v1(40.6,51.2)
  Bottom w0.5: C35.2 40.5,50.1 40.6,50.2 v1(40.6,51.2)
NetC39_2: C39.2 DA3.3 R19.1 R20.2 | length 4.5
  Top w0.3: DA3.3 39.625,13.425 R20.2@40.25,14.05 ; R19.1 R20.2
  Top w0.5: v1(40,14.3) 40.45,14.3 R20.2
NetC41_1: C41.1 DA5.2 L1.1 | length 13.2
  Top w1: v2(2.1,8.9) C41.1 2.1,4.303 L1.1
  Bottom w1: DA5.2 3.3,14 3.9,13.4 3.9,9.7 3.4,9.2 2.4,9.2 v2(2.1,8.9)
NetC41_2: C41.2 DA5.1 L1.4 | length 10.1
  Top w1: DA5.1 3.44,11.46 5.3,9.6 C41.2 5.3,4.8 5.475,4.625 5.675,4.625 L1.4
NetC46_2: C46.2 DA6.3 R24.2 R26.2 | length 4.6
  Top w0.3: DA6.3 39.314,5.425 39.989,4.75 R26.2
  Top w0.5: R26.2 40.85,4.6 R24.2
  other v1: 40.3,5.3
NetC47_2: C47.2 DA2.1 R6.2 R13.1 R16.2 | length 39.5
  Top w0.5: R13.1 23.2,51.1 ; v1(23.5,54.1) 24.7,54.1 24.795,54.005 DA2.1 24.795,51.105 24.8,51.1 23.2,51.1 ; R16.2 33.6,26.5 32.3,27.8 30.9,27.8 29.9,28.8 29.9,31.4 23.15,38.15 R6.2 23.15,51.05 23.2,51.1
  Bottom w0.5: v1(23.5,54.1) C47.2
NetDA1_1: DA1.1 RN1.4 | length 37.5
  Top w0.2: v1(2,42.7) 3.6,42.7 3.712,42.812 3.712,48.488 3.3,48.9 3.3,51 4.9,52.6 7.9,52.6 8,52.7 DA1.1 ; v1(8.1,41.1) 9.2,41.1 15.105,35.195 RN1.4
  Bottom w0.2: v1(2,42.7) 2,42.8 2.1,42.9 2.3,42.7 6.3,42.7 7.9,41.1 v1(8.1,41.1)
NetDA1_2: DA1.2 RN2.4 | length 29.4
  Top w0.2: DA1.2 8.5,52.4 8.2,52.1 5.1,52.1 3.796,50.796 3.796,49.304 4.2,48.9 4.2,41.9 10.005,36.095 RN2.4
NetDA1_35: DA1.35 RN2.3 | length 46
  Top w0.2: v1(2,41.5) 2,41.3 1.9,41.2 1.196,41.904 1.196,52.096 4.8,55.7 4.8,60.742 5.558,61.5 9.5,61.5 DA1.35 ; v1@6.7,41 6.7,40.8 10.9,36.6 RN2.3
  Bottom w0.2: v1(2,41.5) 6.1,41.5 v1(6.6,41)
NetDA1_36: DA1.36 RN1.1 | length 46.4
  Top w0.2: v1(2,46.3) 1.8,46.5 1.8,51.784 5.292,55.276 5.292,60.592 5.71,61.011 9,61.011 DA1.36 ; v1(8.1,44.75) 8.1,44.7 17.695,35.105 RN1.1
  Bottom w0.2: v1(2,46.3) 3.1,45.2 7.6,45.2 8.05,44.75 v1(8.1,44.75)
NetDA1_37: DA1.37 RN1.2 | length 47
  Top w0.2: v1(2,45.1) 2,44.8 2.804,45.604 2.804,47.788 2.3,48.292 2.3,51.642 5.746,55.088 5.746,60.146 6.156,60.556 8.5,60.556 DA1.37 ; v1@8.1,43.2 v1@8,43.3 ; RN1.2 16.8,35.1 8.4,43.5 v1(8.1,43.5) ; v1@8,43.3 7.8,43.5 v1@8.1,43.5 ; v1@8,43.3 8.1,43.4 v1(8.1,43.5)
  Bottom w0.2: v1(2,45.1) 2.4,44.7 6.9,44.7 v1(8.1,43.5) ; v1@8,43.2 8.1,43.3 v1(8.1,43.5) ; v1@8.3,43.3 v1(8.1,43.5)
NetDA1_38: DA1.38 RN1.3 | length 43.8
  Top w0.2: v1(2,43.9) 3.2,43.9 3.258,43.958 3.258,48.242 2.8,48.7 2.8,51.5 6.2,54.9 6.2,59.9 6.4,60.1 8,60.1 DA1.38 ; v1(8.1,42.3) 8.8,42.3 16,35.1 RN1.3
  Bottom w0.2: v1(2,43.9) 6.1,43.9 7.7,42.3 v1(8.1,42.3)
NetDA2_5: DA2.5 R2.2 | length 4.9
  Top w0.5: DA2.5 28.605,58.005 28.8,58.2 30.8,58.2 31.5,57.5 R2.2
NetDA2_6: DA2.6 DA2.7 R1.1 | length 10.5
  Top w0.5: R1.1 25.3,61.5 26.065,60.735 26.065,58.7 ; DA2.7 26.065,58.7 ; DA2.6 27.335,58.765 26.13,58.765 26.065,58.7
NetDA3_2: DA3.2 R19.2 | length 4.4
  Top w0.3: DA3.2 39.275,12.775 39.404,12.646 39.404,10.704 39.758,10.35 R19.2
NetDA6_2: DA6.2 R24.1 | length 3.5
  Top w0.3: DA6.2 39.181,4.775 39.5,4.456 39.5,3.1 39.4,3 38.95,3 R24.1
NetR4_1: R4.1 R5.2 | length 1.4
  Top w0.5: R4.1 11.125,45.4 R5.2
NetR5_1: R5.1 R7.1 | length 1.4
  Top w0.5: R5.1 12.675,45.4 R7.1
NetR9_1: R9.1 R10.2 | length 1.5
  Top w0.5: R9.1 14.625,46.425 R10.2
NetR22_1: R22.1 VD5.1 | length 2.8
  Top w0.5: VD5.1@32.35,-1.409 VD5.1
  Top w0.75: R22.1 32.05,0.15 32.4,-0.2 VD5.1
NetR23_1: R23.1 VD6.1 | length 2.7
  Top w0.75: R23.1 35.65,0.15 36.1,-0.3 VD6.1 VD6.1@36.1,-1.559
NetVD5_2: VD5.2 VT1.3 | length 3
  Top w0.75: v1(30.9,-3.6) 30.959,-3.541 VD5.2
  Bottom w0.5: v1(30.9,-3.6) 32.2,-3.6 VT1.3
NetVD6_2: VD6.2 VT2.3 | length 3.2
  Top w0.75: v1(34.6,-3.8) 34.859,-3.541 VD6.2 VD6.2@36.141,-3.5
  Bottom w0.5: v1(34.6,-3.8) 35.1,-3.8 35.4,-3.5 VT2.3
PRT_1: DA3.6 R17.1 VD1.2 VT1.1 | length 24.9
  Top w0.3: VD1.2 32.767,13.85 33.192,13.425 DA3.6 33.911,13.461 34.595,13.461 34.954,13.821 34.954,13.9 35.2,13.9 35.3,13.8 v1(35.3,13.9) 35.3,15.65 R17.1
  Bottom w0.3: VT1.1 31.35,0.15 31.5,0.3 33.6,0.3 34.246,0.946 34.246,6.719 34.646,7.119 34.646,13.771 34.775,13.9 v1(35.3,13.9)
PRT_2: DA6.6 R21.1 VD3.2 VT2.1 | length 14.8
  Top w0.3: VD3.2 32.158,6.45 33.183,5.425 DA6.6 34.925,5.425 35.246,5.746 v1(35.246,6.511) 35.3,6.565 35.3,6.9 35.05,7.15 R21.1
  Bottom w0.3: VT2.1 35,-1.05 35,0.2 34.8,0.4 34.8,6.065 v1(35.246,6.511)
PRT_ALRM: DD3.2 X2.6B | length 21.1
  Top w0.5: X2.6B 21.4,-1.4 22.8,-1.4 23.9,-0.3 23.9,2.4 22.55,3.75 21.05,3.75 20.1,4.7 20.1,6.8 24.165,10.865 DD3.2
PRT_ALRM_1: DD3.7 R25.2 VD1.1 VD3.1 | length 32.3
  Top w0.3: DD3.7 24.165,23.065 25.3,24.2 v1(31.4,24.2) ; VD3.1 31.4,10 ; v1(31.4,22.1) VD1.1 30.75,15.95 30.7,15.9 30.7,12.7 31.4,12 31.4,10 ; R25.2 35.05,10.046 34.062,10.046 34.054,10.054 33.346,10.054 33.238,9.946 32.446,9.946 32.346,10.046 31.446,10.046 31.4,10
  Bottom w0.3: v1(31.4,22.1) v1(31.4,24.2)
PRT_RST: C25.2 DD3.3 X2.5B | length 29
  Top w0.5: X2.5B 19.3,-2.7 19.9,-3.3 24.5,-3.3 25,-2.8 25,4.6 22.3,4.6 21.1,5.8 21.1,6.734 24.919,10.553 24.919,10.865 25.435,10.865 DD3.3
PRT_RST_1: DA3.5 DA6.5 DD3.6 | length 32.5
  Top w0.3: DD3.6 25.435,22.335 26.3,23.2 32.3,23.2 32.3,19.6 v1(33.7,18.2) ; v1(33.7,9.2) 33.7,6.227 33.888,6.039 DA6.5 ; v1@33.7,18.1 33.7,14.25 DA3.5
  Bottom w0.3: v1(33.7,9.2) v1(33.7,18.2)
SCLK: DD2.12 RN1.7 | length 7.6
  Top w0.5: RN1.7 16.835,28.565 DD2.12
U_U+: R2.1 X1.7 | length 23.3
  Top w0.5: R2.1 31.5,53.6 32.9,52.2 32.9,40.954 37.534,36.32 X1.7
V5_C: C14.2 C15.2 C21.2 C30.2 C38.2 DD1.1 DD2.1 DD2.7 DD3.1 X2.1B | length 64.6
  Top w0.5: C21.2 9.8,11.7 9.8,12.3 10.1,12.6 v1(10.4,12.6) ; C30.2 11.755,8.345 DD2.1 11.755,13.455 12.3,14 v1(14.3,14) ; v1(18.4,14) 19.1,14 19.375,13.725 DD2.7 ; DD3.1 22.9,13.57 v1(22.9,12.3)
  Top w0.75: C21.2 C14.2 ; X2.1B 11.3,-1.7 7.9,-1.7 7.9,2.6 9.7,4.4 C15.2 C14.2 ; v2(13.2,4.7) 12.9,4.7 11.8,5.8 C30.2 C14.2
  Bottom w0.5: v1(10.4,12.6) 10.4,13.97 DD1.1 ; v1(14.3,14) v1(18.4,14) ; v1(22.9,12.3) 22.9,13.1 22.895,13.105 23.29,13.5 C38.2
  Bottom w0.75: v2(13.2,4.7) 23.7,4.7 23.921,4.921 23.921,13.479 C38.2
V12_C: C43.2 C44.2 L1.3 X2.2A | length 19.6
  Top w1: L1.3 5.9,0.097 v2(5.9,-1.8) C44.2 ; C44.2@6.05,-3.8 C44.2@6.05,-3.25 ; v1(9.5,2.5) 13.4,2.5 13.4,1.1 X2.2A
  Bottom w0.75: C43.2 4.7,-1.2 4.9,-1.4 5.5,-1.4 v2(5.9,-1.8)
  Bottom w1: v2(5.9,-1.8) 6.2,-1.5 6.2,1.5 7.2,2.5 v1(9.5,2.5)
pads on no net: DA1.12 DA1.13 DA1.14 DA1.15 DA1.24 DA1.25 DA1.26 DA1.27 DA5.6 RN2.1 RN2.2 RN2.7 RN2.8 X2.0

## Polygon pours and split planes (outlines as drawn)
no net on Bottom Solder "Top Overlay-No Net" (solid): 40.5,-1.5 40.5,-5 44.9,-5 44.9,-1.5
no net on Top Solder "Top Overlay-No Net" (solid): 40.5,-1.5 40.5,-5 44.9,-5 44.9,-1.5
GND_C on Top "Top Overlay-No Net" (solid, pour order 12): 0.05,15 27.6,15 27.6,-5.1 0.05,-5.1
GNDA on Top "Top Overlay-No Net" (solid, pour order 16): 0.5,38.9 21.2,38.9 21.2,52.3 22.2,52.3 22.2,60.4 21.2,60.4 21.2,64.7 0.5,64.7
GND_C on Bottom "Top Overlay-No Net" (solid, pour order 14): 0.1,15.05 0.1,-5.05 27.4,-5.05 27.4,15.05
GNDA on Bottom "Top Overlay-No Net" (solid, pour order 18): 0.5,64.7 0.5,38.9 21.2,38.9 21.2,64.7

## Other copper
Top:
  rectangle: 40.2,58.5 45,65
  rectangle: 40.3,-5 45,-1.4
Bottom:
  rectangle: 40.3,-4.9 44.9,-1.4
  rectangle: 40.2,58.5 45,65

## Silkscreen, mask and mechanical layers (free items; w line width, h text height)
Top Overlay:
  lines w0.1: 4.8,44.1 8.5,44.1 10.425,44.875 ; 4.9,30.1 7.5,31.7 9.9,31.7 ; 8,51.1 10.8,51.1 12.7,49.1 ; 11.9,51 13.3,51 13.892,49.397 ; 13.375,44.875 14.2,41.8 16.7,41.8 ; 29.05,49 31.7,46.4 34.8,46.4
  text "OLTEST 23.05.19" at 6.2,38.3 h1
  text "R100.230.080.000-00" at 4.3,36.2 h1
  text "MeasOutUI" at 9.5,34.4 h1
Bottom Overlay:
  text "R100.230.080.001-00" at 30,36.3 h1
  text "MeasOutUI" at 26,34.6 h1
Top Solder:
  rectangle: 40.2,58.5 45,65
Bottom Solder:
  rectangle: 40.2,58.5 45,65
Board:
  the board outline again, w0.254

## Text inside footprints (layer, text, board x,y; h text height)
VD1: Top Overlay "+" at 30.9,12.9 h1 r270
VD2: Bottom Overlay "+" at 35.075,54.025 h1 r180
VD3: Top Overlay "+" at 30.9,5.5 h1 r270
VD4: Bottom Overlay "+" at 0.275,32.225 h1 r180
VD5: Top Overlay "+" at 32.075,0 h1 r270
VD6: Top Overlay "+" at 35.775,0 h1 r270
X2: Top Overlay "A" at 9.3,4.5 h1